# EAGLE board IndustrialUSBtoModbus_Production (EAGLE 9.7.0), part 1 of 2
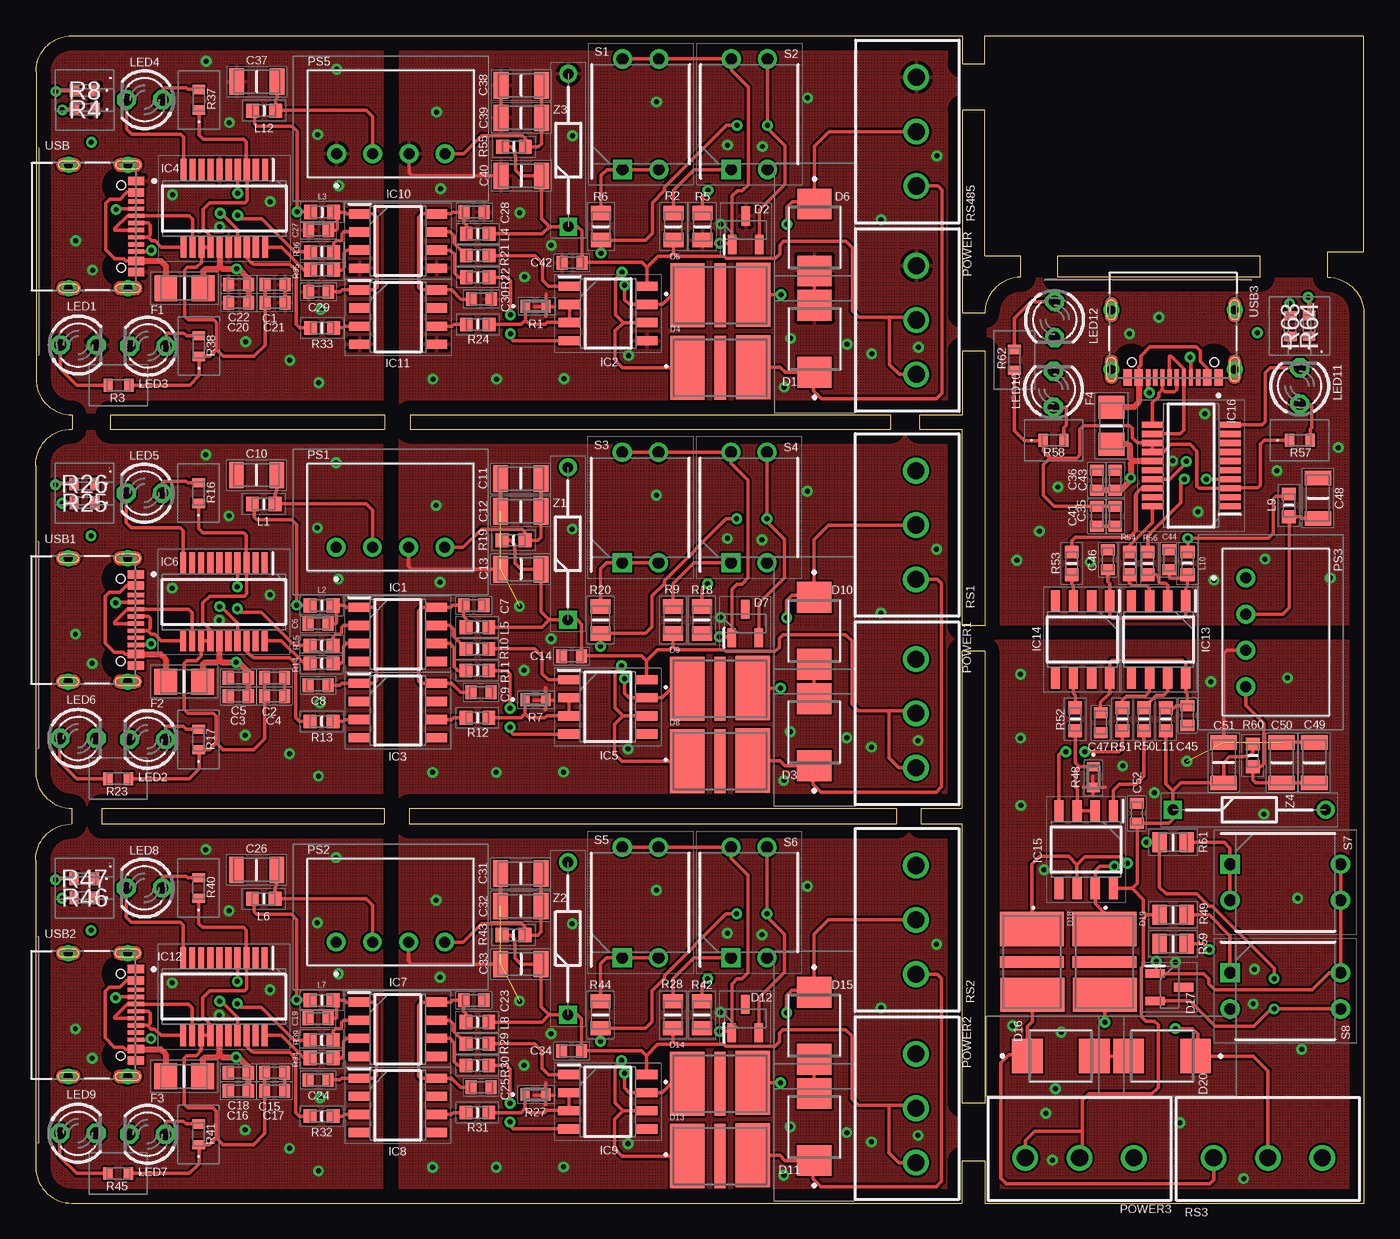
[diagram p0: board, top side]
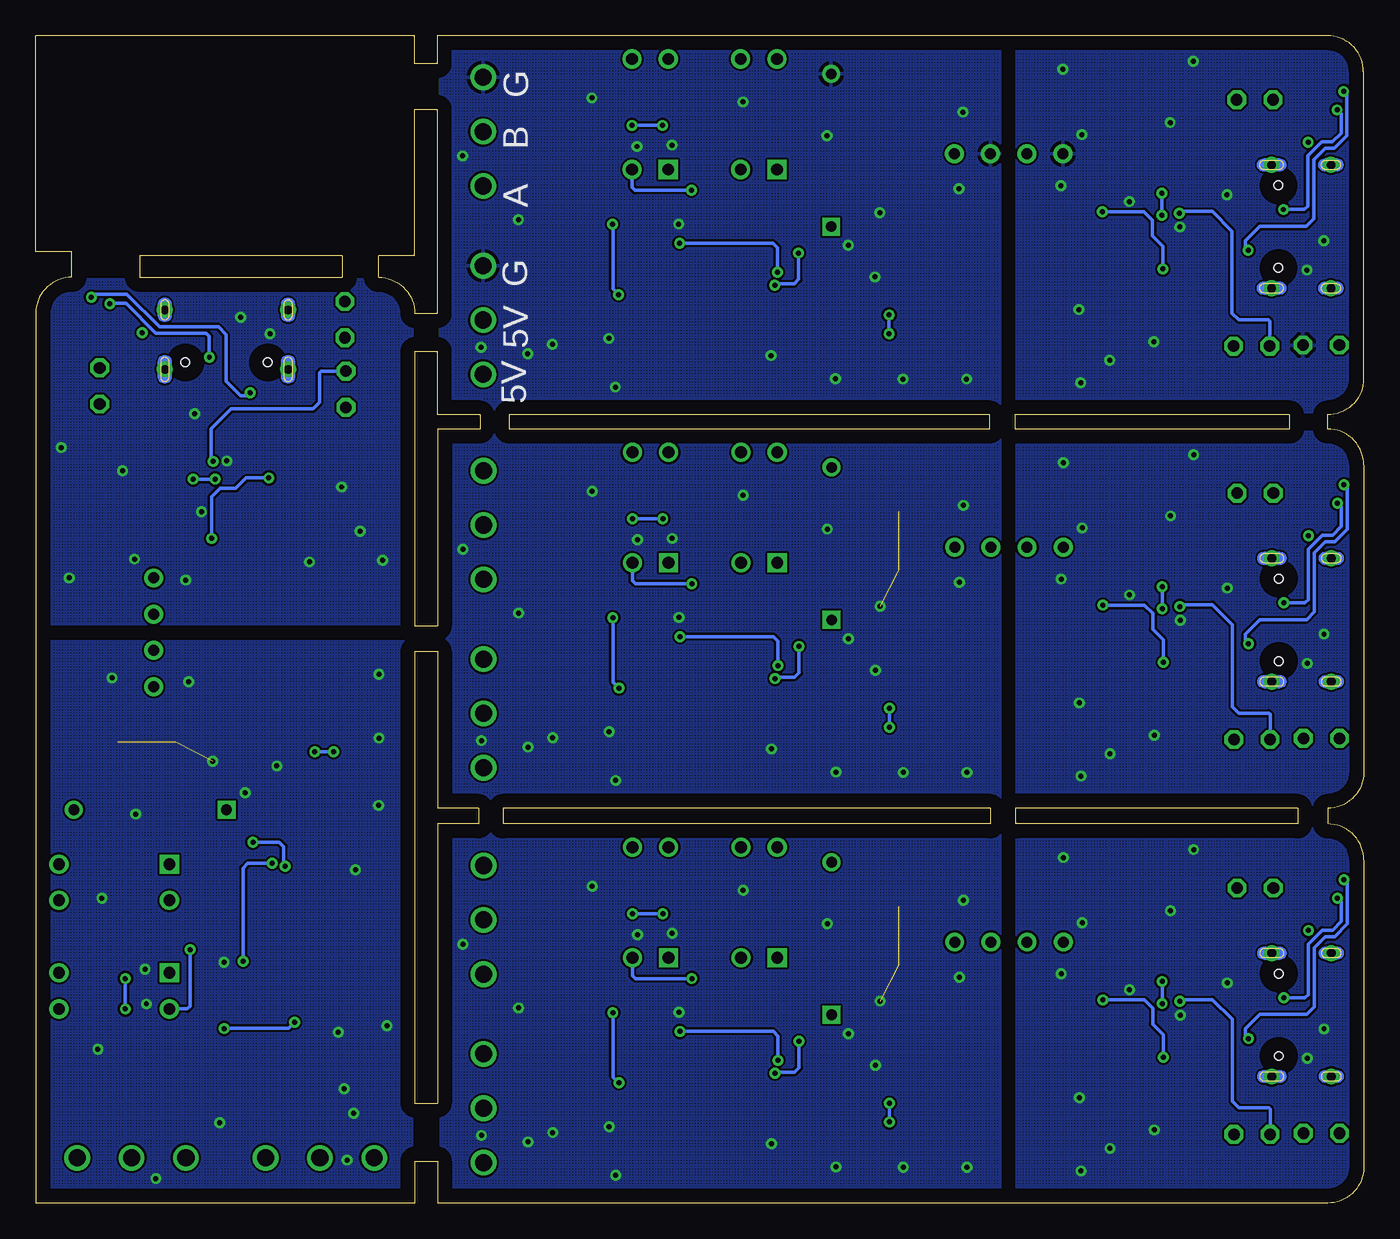
[diagram p1: board, bottom side, seen from below]

Size 93.17 x 81.86 mm. Coordinates in mm from the lower left corner, seen from the top.
Outline: 5.22,55.27 24.47,55.27 24.47,54.28 5.22,54.28 5.22,55.27
Outline: 26.27,55.27 59.97,55.27 59.97,54.28 26.27,54.28 26.27,55.27
Outline: 62,55.27 65,55.27 65,59.73 66.57,59.73 66.57,40.48 64.97,40.48 64.97,54.28 62,54.28 62,55.27
Outline: 0.03,79.32 0.03,57.81 arc90 2.57,55.27 2.57,54.28 2.54,54.28 arc90 0,51.74 0,30.23 arc90 2.54,27.69 2.54,26.59 arc90 0,24.05 0,2.54 arc90 2.54,0 64.97,0 64.97,2.95 66.57,2.95 66.57,0 93.17,0 93.17,62.38 arc90 90.63,64.92 90.63,66.7 93.17,66.7 93.17,81.86 66.57,81.86 66.57,79.91 65,79.91 65,81.86 2.57,81.86 arc90 0.03,79.32
Outline: 65,76.67 65,62.38 66.57,62.38 arc-90 69.11,64.92 69.11,66.45 66.57,66.45 66.57,76.67 65,76.67
Outline: 4.64,27.69 24.43,27.69 24.43,26.59 4.64,26.59 4.64,27.69
Outline: 26.21,27.69 60.39,27.69 60.39,26.59 26.21,26.59 26.21,27.69
Outline: 62.11,27.69 64.97,27.69 64.97,38.68 66.57,38.68 66.57,7.01 64.97,7.01 64.97,26.59 62.11,26.59 62.11,27.69
Outline: 85.88,64.92 71.65,64.92 71.65,66.45 85.88,66.45 85.88,64.92
Copper layers (1*16): Top 0.035mm / dielectric 1.5mm / Bottom 0.035mm
Design rules "Fusion Electronics Design Rules": minimum track width 10mil, minimum drill 0.35mm, track to track 6mil, track to pad 6mil, pad to pad 6mil, via to via 6mil, smd to smd 6mil, copper to edge 40mil, drill to drill 6mil, minimum pad ring 10mil, minimum via ring 8mil, stop-mask expansion 4mil, vias tented up to drill 0.36mm, thermal gap 10mil

## Footprints (pad centres in the part's own frame; a part is rotated, then mirrored left to right if it is on the bottom)
CAPC1608X87N = smd 0.78 x 0.98: 1 -0.7,0; 2 0.7,0
CAPC3216X170N = smd 1.03 x 1.87: 1 -1.42,0; 2 1.42,0
TISP4240M3BJRS = smd 2.16 x 2.4: 1 -2.35,0; 2 2.35,0
SOT95P237X111-3N = smd 1.35 x 0.6: 1 -1,0.95; 2 -1,-0.95; 3 1,0
DIOC650X400X100N = smd 2.4 x 4.5: 1 -2.3,0; 3 2.3,0.05 | smd 0.8 x 4.5: 2 0,0
FUSC3216X75N = smd 1.61 x 1.82: 1 -1.3,0; 2 1.3,0
SOIC127P600X175-8N = smd 1.5 x 0.65: 1 -2.7,1.905; 2 -2.7,0.635; 3 -2.7,-0.635; 4 -2.7,-1.905; 5 2.7,-1.905; 6 2.7,-0.635; 7 2.7,0.635; 8 2.7,1.905
SOIC127P600X175-8N' = smd 1.525 x 0.65: 1 -2.712,1.905; 2 -2.712,0.635; 3 -2.712,-0.635; 4 -2.712,-1.905; 5 2.712,-1.905; 6 2.712,-0.635; 7 2.712,0.635; 8 2.712,1.905
SOP64P599X175-20N = smd 1.526 x 0.435: 1 -2.712,2.858; 2 -2.712,2.222; 3 -2.712,1.588; 4 -2.712,0.952; 5 -2.712,0.318; 6 -2.712,-0.318; 7 -2.712,-0.952; 8 -2.712,-1.588; 9 -2.712,-2.222; 10 -2.712,-2.858; 11 2.712,-2.858; 12 2.712,-2.222; 13 2.712,-1.588; 14 2.712,-0.952; 15 2.712,-0.318; 16 2.712,0.318; 17 2.712,0.952; 18 2.712,1.588; 19 2.712,2.222; 20 2.712,2.858
INDC1608X95N = smd 0.9 x 1: 1 -0.8,0; 2 0.8,0
LED3MM = drill 0.813 octagon: A -1.27,0; K 1.27,0
1803439 = drill 1.2 pad 1.8: 1 -7.62,0; 2 -3.81,0; 3 0,0
IL0505S = drill 0.77 pad 1.32: 1 -3.81,-1.755; 2 -1.27,-1.755; 3 1.27,-1.755; 4 3.81,-1.755
ERJ3EK_(0603) = smd 0.65 x 0.9: 1 -0.725,0; 2 0.725,0
RESC2012X65N = smd 1 x 1.4: 1 -0.95,0; 2 0.95,0
ERJH3 = smd 0.65 x 0.9: 1 -0.725,0; 2 0.725,0
RESC1608X55N = smd 0.9 x 0.95: 1 -0.8,0; 2 0.8,0
DIP775W63P254L655H458Q4N = drill 0.83 pad 1.23 square: 1 -3.875,1.27 | drill 0.83 pad 1.23: 2 -3.875,-1.27; 3 3.875,-1.27; 4 3.875,1.27
HRO_TYPE-C-31-M-12 = smd 0.6 x 1.14: A1_B12 -3.2,4.75; A4_B9 -2.4,4.75; B1_A12 3.2,4.75; B4_A9 2.4,4.75 | smd 0.3 x 1.14: A5 -1.25,4.75; A6 -0.25,4.75; A7 0.25,4.75; A8 1.25,4.75; B5 1.75,4.75; B6 0.75,4.75; B7 -0.75,4.75; B8 -1.75,4.75 | drill 0.6 pad 0.9: S1 -4.325,4.17; S2 4.325,4.17; S3 -4.325,0; S4 4.325,0 | hole 0.6: -2.89,3.68; 2.89,3.68
DIOAD1068W53L380D172 = drill 0.75 pad 1.15 square: 1 0,0 | drill 0.75 pad 1.15: 2 10.7,0

## Placement (x,y rotation side)
C1  100nf  [CAPC1608X87N]  16.79,64.41 0 top
C2  100nf  [CAPC1608X87N]  16.76,36.83 0 top
C3  100nf  [CAPC1608X87N]  14.22,35.56 0 top
C4  100nf  [CAPC1608X87N]  16.76,35.56 0 top
C5  100nf  [CAPC1608X87N]  14.22,36.83 0 top
C6  100nf  [CAPC1608X87N]  19.81,40.64 180 top
C7  100nf  [CAPC1608X87N]  30.73,41.91 0 top
C8  100nf  [CAPC1608X87N]  19.81,36.32 180 top
C9  100nf  [CAPC1608X87N]  31.24,35.81 0 top
C10  10uf  [CAPC3216X170N]  15.49,51.05 180 top
C11  10uf  [CAPC3216X170N]  34.04,50.8 180 top
C12  10uf  [CAPC3216X170N]  34.04,48.51 180 top
C13  10uf  [CAPC3216X170N]  34.04,44.45 0 top
C14  100nf  [CAPC1608X87N]  37.59,38.35 0 top
C15  100nf  [CAPC1608X87N]  16.76,9.14 0 top
C16  100nf  [CAPC1608X87N]  14.22,7.87 0 top
C17  100nf  [CAPC1608X87N]  16.76,7.87 0 top
C18  100nf  [CAPC1608X87N]  14.22,9.14 0 top
C19  100nf  [CAPC1608X87N]  19.81,12.95 180 top
C20  100nf  [CAPC1608X87N]  14.25,63.14 0 top
C21  100nf  [CAPC1608X87N]  16.79,63.14 0 top
C22  100nf  [CAPC1608X87N]  14.25,64.41 0 top
C23  100nf  [CAPC1608X87N]  30.73,14.22 0 top
C24  100nf  [CAPC1608X87N]  19.81,8.64 180 top
C25  100nf  [CAPC1608X87N]  31.24,8.13 0 top
C26  10uf  [CAPC3216X170N]  15.49,23.37 180 top
C27  100nf  [CAPC1608X87N]  19.84,68.22 180 top
C28  100nf  [CAPC1608X87N]  30.76,69.49 0 top
C29  100nf  [CAPC1608X87N]  19.84,63.91 180 top
C30  100nf  [CAPC1608X87N]  31.27,63.4 0 top
C31  10uf  [CAPC3216X170N]  34.04,23.11 180 top
C32  10uf  [CAPC3216X170N]  34.04,20.83 180 top
C33  10uf  [CAPC3216X170N]  34.04,16.76 0 top
C34  100nf  [CAPC1608X87N]  37.59,10.67 0 top
C35  100nf  [CAPC1608X87N]  75.72,48.16 270 top
C36  100nf  [CAPC1608X87N]  74.45,50.7 270 top
C37  10uf  [CAPC3216X170N]  15.52,78.64 180 top
C38  10uf  [CAPC3216X170N]  34.06,78.38 180 top
C39  10uf  [CAPC3216X170N]  34.06,76.1 180 top
C40  10uf  [CAPC3216X170N]  34.06,72.03 0 top
C41  100nf  [CAPC1608X87N]  74.45,48.16 270 top
C42  100nf  [CAPC1608X87N]  37.62,65.94 0 top
C43  100nf  [CAPC1608X87N]  75.72,50.7 270 top
C44  100nf  [CAPC1608X87N]  79.53,45.11 90 top
C45  100nf  [CAPC1608X87N]  80.8,34.19 270 top
C46  100nf  [CAPC1608X87N]  75.21,45.11 90 top
C47  100nf  [CAPC1608X87N]  74.7,33.68 270 top
C48  10uf  [CAPC3216X170N]  89.94,49.43 90 top
C49  10uf  [CAPC3216X170N]  89.69,30.89 90 top
C50  10uf  [CAPC3216X170N]  87.4,30.89 90 top
C51  10uf  [CAPC3216X170N]  83.34,30.89 270 top
C52  100nf  [CAPC1608X87N]  77.24,27.33 270 top
D1  TISP4240M3BJR-S  [TISP4240M3BJRS]  54.64,60.6 90 top
D2  SM712-02HTG  [SOT95P237X111-3N]  49.81,68.22 90 top
D3  TISP4240M3BJR-S  [TISP4240M3BJRS]  54.61,33.02 90 top
D4  TBU-CA065-200-WH  [DIOC650X400X100N]  48.03,58.57 0 top
D5  TBU-CA065-200-WH  [DIOC650X400X100N]  48.03,63.65 0 top
D6  TISP4240M3BJR-S  [TISP4240M3BJRS]  54.64,67.72 270 top
D7  SM712-02HTG  [SOT95P237X111-3N]  49.78,40.64 90 top
D8  TBU-CA065-200-WH  [DIOC650X400X100N]  48.01,30.99 0 top
D9  TBU-CA065-200-WH  [DIOC650X400X100N]  48.01,36.07 0 top
D10  TISP4240M3BJR-S  [TISP4240M3BJRS]  54.61,40.13 270 top
D11  TISP4240M3BJR-S  [TISP4240M3BJRS]  54.61,5.33 90 top
D12  SM712-02HTG  [SOT95P237X111-3N]  49.78,12.95 90 top
D13  TBU-CA065-200-WH  [DIOC650X400X100N]  48.01,3.3 0 top
D14  TBU-CA065-200-WH  [DIOC650X400X100N]  48.01,8.38 0 top
D15  TISP4240M3BJR-S  [TISP4240M3BJRS]  54.61,12.45 270 top
D16  TISP4240M3BJR-S  [TISP4240M3BJRS]  71.91,10.31 0 top
D17  SM712-02HTG  [SOT95P237X111-3N]  79.53,15.14 0 top
D18  TBU-CA065-200-WH  [DIOC650X400X100N]  69.88,16.92 270 top
D19  TBU-CA065-200-WH  [DIOC650X400X100N]  74.96,16.92 270 top
D20  TISP4240M3BJR-S  [TISP4240M3BJRS]  79.02,10.31 180 top
F1  0ZCJ0010FF2E  [FUSC3216X75N]  10.44,64.16 180 top
F2  0ZCJ0010FF2E  [FUSC3216X75N]  10.41,36.58 180 top
F3  0ZCJ0010FF2E  [FUSC3216X75N]  10.41,8.89 180 top
F4  0ZCJ0010FF2E  [FUSC3216X75N]  75.46,54.51 90 top
IC1  ADUM1201ARZ  [SOIC127P600X175-8N]  25.4,39.88 0 top
IC2  MAX485CSA+  [SOIC127P600X175-8N']  40.16,62.38 0 top
IC3  ADUM1201ARZ  [SOIC127P600X175-8N]  25.4,34.54 0 top
IC4  FT231XS-R  [SOP64P599X175-20N]  13.23,69.75 270 top
IC5  MAX485CSA+  [SOIC127P600X175-8N']  40.13,34.8 0 top
IC6  FT231XS-R  [SOP64P599X175-20N]  13.21,42.16 270 top
IC7  ADUM1201ARZ  [SOIC127P600X175-8N]  25.4,12.19 0 top
IC8  ADUM1201ARZ  [SOIC127P600X175-8N]  25.4,6.86 0 top
IC9  MAX485CSA+  [SOIC127P600X175-8N']  40.13,7.11 0 top
IC10  ADUM1201ARZ  [SOIC127P600X175-8N]  25.43,67.46 0 top
IC11  ADUM1201ARZ  [SOIC127P600X175-8N]  25.43,62.13 0 top
IC12  FT231XS-R  [SOP64P599X175-20N]  13.21,14.48 270 top
IC13  ADUM1201ARZ  [SOIC127P600X175-8N]  78.77,39.52 270 top
IC14  ADUM1201ARZ  [SOIC127P600X175-8N]  73.43,39.52 270 top
IC15  MAX485CSA+  [SOIC127P600X175-8N']  73.69,24.79 270 top
IC16  FT231XS-R  [SOP64P599X175-20N]  81.05,51.71 180 top
L1  300ohms  [INDC1608X95N]  16,49.02 0 top
L2  300ohms  [INDC1608X95N]  20.07,41.91 0 top
L3  300ohms  [INDC1608X95N]  20.09,69.49 0 top
L4  300ohms  [INDC1608X95N]  31.01,67.97 0 top
L5  300ohms  [INDC1608X95N]  30.99,40.39 0 top
L6  300ohms  [INDC1608X95N]  16,21.34 0 top
L7  300ohms  [INDC1608X95N]  20.07,14.22 0 top
L8  300ohms  [INDC1608X95N]  30.99,12.7 0 top
L9  300ohms  [INDC1608X95N]  87.91,48.92 270 top
L10  300ohms  [INDC1608X95N]  80.8,44.86 270 top
L11  300ohms  [INDC1608X95N]  79.27,33.93 270 top
L12  300ohms  [INDC1608X95N]  16.03,76.61 0 top
LED1  [LED3MM]  3,60.17 0 top
LED2  [LED3MM]  7.85,32.51 180 top
LED3  [LED3MM]  7.87,60.1 180 top
LED4  [LED3MM]  7.65,77.37 180 top
LED5  [LED3MM]  7.62,49.78 180 top
LED6  [LED3MM]  2.97,32.59 0 top
LED7  [LED3MM]  7.85,4.83 180 top
LED8  [LED3MM]  7.62,22.1 180 top
LED9  [LED3MM]  2.97,4.9 0 top
LED10  [LED3MM]  71.4,57.07 90 top
LED11  [LED3MM]  88.67,57.3 90 top
LED12  [LED3MM]  71.48,61.95 270 top
POWER  1803439  [1803439]  61.77,58.12 270 top
POWER1  1803439  [1803439]  61.75,30.53 270 top
POWER2  1803439  [1803439]  61.75,2.84 270 top
POWER3  1803439  [1803439]  69.42,3.18 180 top
PS1  IL0505S  [IL0505S]  24.89,47.75 0 top
PS2  IL0505S  [IL0505S]  24.89,20.07 0 top
PS3  IL0505S  [IL0505S]  86.64,40.03 270 top
PS5  IL0505S  [IL0505S]  24.92,75.34 0 top
R1  10k  [ERJ3EK_(0603)]  35.08,62.89 0 top
R2  4k7  [RESC2012X65N]  44.73,68.48 90 top
R3  330  [ERJH3]  5.82,57.35 180 top
R4  5.1k  [ERJH3]  3.45,76.69 180 top
R5  4k7  [RESC2012X65N]  46.76,68.48 90 top
R6  120  [RESC2012X65N]  39.65,68.48 90 top
R7  10k  [ERJ3EK_(0603)]  35.05,35.31 0 top
R8  5.1k  [ERJH3]  3.44,78.02 180 top
R9  4k7  [RESC2012X65N]  44.7,40.89 90 top
R10  47r  [RESC1608X55N]  30.99,38.86 0 top
R11  47r  [RESC1608X55N]  30.99,37.34 0 top
R12  47r  [RESC1608X55N]  30.99,34.04 0 top
R13  47r  [RESC1608X55N]  20.07,33.78 180 top
R14  47r  [RESC1608X55N]  20.07,37.85 180 top
R15  47r  [RESC1608X55N]  20.07,39.12 180 top
R16  330  [ERJH3]  11.43,49.78 90 top
R17  330  [ERJH3]  11.43,32.51 90 top
R18  4k7  [RESC2012X65N]  46.74,40.89 90 top
R19  300ohms  [INDC1608X95N]  33.53,46.48 180 top
R20  120  [RESC2012X65N]  39.62,40.89 90 top
R21  47r  [RESC1608X55N]  31.01,66.45 0 top
R22  47r  [RESC1608X55N]  31.01,64.92 0 top
R23  330  [ERJH3]  5.79,29.77 180 top
R24  47r  [RESC1608X55N]  31.01,61.62 0 top
R25  5.1k  [ERJH3]  3.43,49.11 180 top
R26  5.1k  [ERJH3]  3.42,50.43 180 top
R27  10k  [ERJ3EK_(0603)]  35.05,7.62 0 top
R28  4k7  [RESC2012X65N]  44.7,13.21 90 top
R29  47r  [RESC1608X55N]  30.99,11.18 0 top
R30  47r  [RESC1608X55N]  30.99,9.65 0 top
R31  47r  [RESC1608X55N]  30.99,6.35 0 top
R32  47r  [RESC1608X55N]  20.07,6.1 180 top
R33  47r  [RESC1608X55N]  20.09,61.37 180 top
R34  47r  [RESC1608X55N]  20.07,10.16 180 top
R35  47r  [RESC1608X55N]  20.09,65.43 180 top
R36  47r  [RESC1608X55N]  20.09,66.7 180 top
R37  330  [ERJH3]  11.46,77.37 90 top
R38  330  [ERJH3]  11.46,60.1 90 top
R39  47r  [RESC1608X55N]  20.07,11.43 180 top
R40  330  [ERJH3]  11.43,22.1 90 top
R41  330  [ERJH3]  11.43,4.83 90 top
R42  4k7  [RESC2012X65N]  46.74,13.21 90 top
R43  300ohms  [INDC1608X95N]  33.53,18.8 180 top
R44  120  [RESC2012X65N]  39.62,13.21 90 top
R45  330  [ERJH3]  5.79,2.08 180 top
R46  5.1k  [ERJH3]  3.43,21.42 180 top
R47  5.1k  [ERJH3]  3.42,22.74 180 top
R48  10k  [ERJ3EK_(0603)]  74.19,29.87 270 top
R49  4k7  [RESC2012X65N]  79.78,20.22 0 top
R50  47r  [RESC1608X55N]  77.75,33.93 270 top
R51  47r  [RESC1608X55N]  76.23,33.93 270 top
R52  47r  [RESC1608X55N]  72.92,33.93 270 top
R53  47r  [RESC1608X55N]  72.67,44.86 90 top
R54  47r  [RESC1608X55N]  76.73,44.86 90 top
R55  300ohms  [INDC1608X95N]  33.55,74.07 180 top
R56  47r  [RESC1608X55N]  78,44.86 90 top
R57  330  [ERJH3]  88.67,53.49 0 top
R58  330  [ERJH3]  71.4,53.49 0 top
R59  4k7  [RESC2012X65N]  79.78,18.19 0 top
R60  300ohms  [INDC1608X95N]  85.37,31.39 90 top
R61  120  [RESC2012X65N]  79.78,25.3 0 top
R62  330  [ERJH3]  68.66,59.13 90 top
R63  5.1k  [ERJH3]  88,61.49 90 top
R64  5.1k  [ERJH3]  89.32,61.51 90 top
RS1  1803439  [1803439]  61.75,43.74 270 top
RS2  1803439  [1803439]  61.75,16.05 270 top
RS3  1803439  [1803439]  82.63,3.18 180 top
RS485  1803439  [1803439]  61.77,71.32 270 top
S1  210-2MS  [DIP775W63P254L655H458Q4N]  42.44,76.35 90 top
S2  210-2MS  [DIP775W63P254L655H458Q4N]  50.06,76.35 90 top
S3  210-2MS  [DIP775W63P254L655H458Q4N]  42.42,48.77 90 top
S4  210-2MS  [DIP775W63P254L655H458Q4N]  50.04,48.77 90 top
S5  210-2MS  [DIP775W63P254L655H458Q4N]  42.42,21.08 90 top
S6  210-2MS  [DIP775W63P254L655H458Q4N]  50.04,21.08 90 top
S7  210-2MS  [DIP775W63P254L655H458Q4N]  87.66,22.5 0 top
S8  210-2MS  [DIP775W63P254L655H458Q4N]  87.66,14.88 0 top
USB  TYPE-C-31-M-12  [HRO_TYPE-C-31-M-12]  2.31,68.48 270 top
USB1  TYPE-C-31-M-12  [HRO_TYPE-C-31-M-12]  2.29,40.89 270 top
USB2  TYPE-C-31-M-12  [HRO_TYPE-C-31-M-12]  2.29,13.21 270 top
USB3  TYPE-C-31-M-12  [HRO_TYPE-C-31-M-12]  79.78,62.64 180 top
Z1  1N5231CTR  [DIOAD1068W53L380D172]  37.34,40.89 90 top
Z2  1N5231CTR  [DIOAD1068W53L380D172]  37.34,13.21 90 top
Z3  1N5231CTR  [DIOAD1068W53L380D172]  37.36,68.48 90 top
Z4  1N5231CTR  [DIOAD1068W53L380D172]  79.78,27.58 0 top

## Library data of the parts
C1-C5 C14-C18 C20-C22 C34-C36 C41-C43 C52 = AKCP; DESCRIPTION: Wurth Elektronik 0603 WCAP-CSGP 100nF Ceramic Multilayer Capacitor, 25 V dc, +125C, X7R Dielectric, +/-10%; DIGIKEY_PARTNUMBER: 732-7989-1-ND; DIGIKEY_PRICE-STOCK: https://www.digikey.com/product-detail/en/w%C3%BCrth-elektronik/885012206071/732-7989-1-ND/5454616; HEIGHT: 0.87mm; MANUFACTURER_NAME: Wurth Elektronik; MANUFACTURER_PART_NUMBER: 885012206071; MOUSER_PART_NUMBER: 710-885012206071; MOUSER_PRICE-STOCK: https://www.mouser.co.uk/ProductDetail/Wurth-Elektronik/885012206071?qs=0KOYDY2FL2%2FEBQkuHgvarg%3D%3D
C6-C9 C19 C23-C25 C27-C30 C44-C47 = Raritan Base; DESCRIPTION: Wurth Elektronik 0603 WCAP-CSGP 100nF Ceramic Multilayer Capacitor, 25 V dc, +125C, X7R Dielectric, +/-10%; DIGIKEY_PARTNUMBER: 732-7989-1-ND; DIGIKEY_PRICE-STOCK: https://www.digikey.com/product-detail/en/w%C3%BCrth-elektronik/885012206071/732-7989-1-ND/5454616; HEIGHT: 0.87mm; MANUFACTURER_NAME: Wurth Elektronik; MANUFACTURER_PART_NUMBER: 885012206071; MOUSER_PART_NUMBER: 710-885012206071; MOUSER_PRICE-STOCK: https://www.mouser.co.uk/ProductDetail/Wurth-Elektronik/885012206071?qs=0KOYDY2FL2%2FEBQkuHgvarg%3D%3D
C10-C13 C26 C31-C33 C37-C40 C48-C51 = SamacSys_Parts; DESCRIPTION: Multilayer Ceramic Capacitors MLCC - SMD/SMT 10uF 25volts 10%; HEIGHT: 1.7mm; MANUFACTURER_NAME: Vishay; MANUFACTURER_PART_NUMBER: VJ1206G106KXXTW1BC; MOUSER_PART_NUMBER: 77-VJ126G106KXXTW1BC; MOUSER_PRICE-STOCK: https://www.mouser.co.uk/ProductDetail/Vishay-Vitramon/VJ1206G106KXXTW1BC?qs=%252BqhDFMvZazSFJ5Hhl5VYQw%3D%3D
D1 D3 D6 D10 D11 D15 D16 D20 = TISP4240M3BJR-S; DESCRIPTION: BOURNS - TISP4240M3BJR-S - THYRISTOR, O.VOLT. PROT., 180V, SMB; HEIGHT: 2.4mm; MANUFACTURER_NAME: Bourns; MANUFACTURER_PART_NUMBER: TISP4240M3BJR-S; MOUSER_PART_NUMBER: 652-TISP4240M3BJR-S; MOUSER_PRICE-STOCK: https://www.mouser.co.uk/ProductDetail/Bourns/TISP4240M3BJR-S?qs=0zoXPJiSMmNlDn5QEdP1vg%3D%3D
D2 D7 D12 D17 = SamacSys_Parts; DESCRIPTION: ESD Suppressors / TVS Diodes 600W 2 Channel Green Asymmetrical SOT23-3; DIGIKEY_PARTNUMBER: F6450CT-ND; DIGIKEY_PRICE-STOCK: https://www.digikey.com/product-detail/en/littelfuse-inc/SM712-02HTG/F6450CT-ND/5019610; HEIGHT: 1.11mm; MANUFACTURER_NAME: LITTELFUSE; MANUFACTURER_PART_NUMBER: SM712-02HTG; MOUSER_PART_NUMBER: 576-SM712-02HTG; MOUSER_PRICE-STOCK: https://www.mouser.co.uk/ProductDetail/Littelfuse/SM712-02HTG?qs=aGgfWYEhH7lQgBVBPCUDkw%3D%3D
D4 D5 D8 D9 D13 D14 D18 D19 = TBU-CA065-200-WH; AVAILABILITY: In Stock; CHECK_PRICES: https://www.snapeda.com/parts/TBU-CA065-200-WH/Bourns+-+J.W.+Miller/view-part/?ref=eda; DESCRIPTION: A Single Bi-Directional, 650V, 200mA, 3-Pin DFN pkg TBU | Bourns TBU-CA065-200-WH; MF: Bourns; MP: TBU-CA065-200-WH; PACKAGE: SMD-4 Bourns; PRICE: None; PURCHASE-URL: https://www.snapeda.com/api/url_track_click_mouser/?unipart_id=587286&manufacturer=Bourns&part_name=TBU-CA065-200-WH&search_term=None; SNAPEDA_LINK: https://www.snapeda.com/parts/TBU-CA065-200-WH/Bourns+-+J.W.+Miller/view-part/?ref=snap
F1-F4 = AccesControlNFC; DESCRIPTION: Resettable Fuses - PPTC Fuse; HEIGHT: 0.75mm; MANUFACTURER_NAME: Stewart Connector; MANUFACTURER_PART_NUMBER: 0ZCJ0010FF2E; MOUSER_PART_NUMBER: 530-0ZCJ0010FF2E; MOUSER_PRICE-STOCK: https://www.mouser.co.uk/ProductDetail/Bel-Fuse/0ZCJ0010FF2E?qs=SRYZG9HaIQ2ZPdy0ahZ08g%3D%3D
IC1 IC3 IC7 IC8 IC10 IC11 IC13 IC14 = Raritan Base; DESCRIPTION: Dual-Channel Digital Isolators; HEIGHT: 1.75mm; MANUFACTURER_NAME: Analog Devices; MANUFACTURER_PART_NUMBER: ADUM1201ARZ; MOUSER_PART_NUMBER: 584-ADUM1201ARZ; MOUSER_PRICE-STOCK: https://www.mouser.co.uk/ProductDetail/Analog-Devices/ADUM1201ARZ?qs=WIvQP4zGanhnZkk5OvV4Vw%3D%3D
IC2 IC5 IC9 IC15 = AKCP; DESCRIPTION: MAX485CSA+, Line Transceiver, RS-485, RS-422 2.5Mbit/s Differential, 5V, 8-Pin SOIC; HEIGHT: 1.75mm; MANUFACTURER_NAME: Maxim Integrated; MANUFACTURER_PART_NUMBER: MAX485CSA+; MOUSER_PART_NUMBER: 700-MAX485CSA; MOUSER_PRICE-STOCK: https://www.mouser.co.uk/ProductDetail/Maxim-Integrated/MAX485CSA%2b?qs=1THa7WoU59EQmpurcwoy4Q%3D%3D
IC4 IC6 IC12 IC16 = AKCP; DESCRIPTION: FTDI Chip FT231XS-R, Interface RS232, RS422, RS485, SIE, UART 3MBd, 5 V, 20-pin, SSOP; HEIGHT: 1.753mm; MANUFACTURER_NAME: FTDI Chip; MANUFACTURER_PART_NUMBER: FT231XS-R; MOUSER_PART_NUMBER: 895-FT231XS-R; MOUSER_PRICE-STOCK: https://www.mouser.co.uk/ProductDetail/FTDI/FT231XS-R?qs=Gp1Yz1mis3WduRPsgrTbtg%3D%3D
L1-L12 R19 R43 R55 R60 = Raritan Base; ARROW_PART_NUMBER: MMZ1608B301CTAH0; DESCRIPTION: Ferrite Beads Multi-Layer 300Ohm 25% 100MHz 500mA 250mOhm DCR 0603 T/R; HEIGHT: 0.95mm; MANUFACTURER_NAME: TDK; MANUFACTURER_PART_NUMBER: MMZ1608B301CTAH0
LED1-LED12 = led
POWER POWER1-POWER3 RS1-RS3 RS485 = 1803439; DESCRIPTION: 3 way vertical PCB header,3.81mm pitch Phoenix Contact MCV Series, 3.81mm Pitch 3 Way 1 Row Straight PCB Header, Solder Termination, 8A; HEIGHT: mm; MANUFACTURER_NAME: Phoenix Contact; MANUFACTURER_PART_NUMBER: 1803439; MOUSER_PART_NUMBER: 651-1803439; MOUSER_PRICE-STOCK: https://www.mouser.co.uk/ProductDetail/Phoenix-Contact/1803439?qs=ChwaSN6Xm4%2FKqu7eZUAe4w%3D%3D
PS1-PS3 PS5 = IL0505S; DESCRIPTION: DC/DC Converter Isolated 5V 2W XP Power Through Hole 2W Isolated DC-DC Converter, Vin 4.5 5.5 V dc, I/O isolation 1000V dc, Vout 5V dc; HEIGHT: mm; MANUFACTURER_NAME: XP POWER; MANUFACTURER_PART_NUMBER: IL0505S; MOUSER_PART_NUMBER: 209-IL0505S; MOUSER_PRICE-STOCK: https://www.mouser.co.uk/ProductDetail/XP-Power/IL0505S?qs=w%2Fv1CP2dgqqMDzpB%252BgTJVA%3D%3D
R1 R7 R27 R48 = AKCP; DESCRIPTION: Thick Film Resistors - SMD 0603 10Kohms 1% AEC-Q200; HEIGHT: 0.55mm; MANUFACTURER_NAME: Panasonic; MANUFACTURER_PART_NUMBER: ERJ-3EKF1002V; MOUSER_PART_NUMBER: 667-ERJ-3EKF1002V; MOUSER_PRICE-STOCK: https://www.mouser.co.uk/ProductDetail/Panasonic/ERJ-3EKF1002V?qs=H7k1u0Mp9JSrGPQ5%2F5COuw%3D%3D
R2 R5 R6 R9 R18 R20 R28 R42 R44 R49 R59 R61 = SamacSys_Parts; ARROW_PART_NUMBER: ESR10EZPJ121; DESCRIPTION: Thick Film Resistors - SMD 0805 120ohm 5% Anti Surge AEC-Q200; DIGIKEY_PARTNUMBER: RHM120KCT-ND; DIGIKEY_PRICE-STOCK: https://www.digikey.com/product-detail/en/rohm-semiconductor/ESR10EZPJ121/RHM120KCT-ND/1762959; HEIGHT: 0.65mm; MANUFACTURER_NAME: ROHM Semiconductor; MANUFACTURER_PART_NUMBER: ESR10EZPJ121; MOUSER_PART_NUMBER: 755-ESR10EZPJ121; MOUSER_PRICE-STOCK: https://www.mouser.co.id/ProductDetail/ROHM-Semiconductor/ESR10EZPJ121?qs=%2Fha2pyFadui7JatYYUNpFhsZLPns7z%252BGDgMyY6tORV%2FueGFgrTXlFg%3D%3D; SPICEPREFIX: R
R3 R4 R8 R16 R17 R23 R25 R26 R37 R38 R40 R41 R45-R47 R57 R58 R62-R64 = AKCP; DESCRIPTION: Power Rating 0.125W,Resistance 330 Ohm,LxW(EIA) 1.6 x 0.8 (EIA:0603) mm; HEIGHT: mm; MANUFACTURER_NAME: Panasonic; MANUFACTURER_PART_NUMBER: ERJ-H3EF3300V; MOUSER_PART_NUMBER: 667-ERJ-H3EF3300V; MOUSER_PRICE-STOCK: https://www.mouser.co.uk/ProductDetail/Panasonic/ERJ-H3EF3300V?qs=eP2BKZSCXI61roRLPi8W7w%3D%3D
R10-R15 R21 R22 R24 R29-R36 R39 R50-R54 R56 = Raritan Base; DESCRIPTION: ERJ-PA3J470V; DIGIKEY_PARTNUMBER: P47.00BZCT-ND; DIGIKEY_PRICE-STOCK: https://www.digikey.com/product-detail/en/panasonic-electronic-components/ERJ-PA3J470V/P47-00BZCT-ND/5036330; HEIGHT: 0.55mm; MANUFACTURER_NAME: Panasonic; MANUFACTURER_PART_NUMBER: ERJ-PA3J470V; MOUSER_PART_NUMBER: 667-ERJ-PA3J470V; MOUSER_PRICE-STOCK: https://www.mouser.co.id/ProductDetail/Panasonic/ERJ-PA3J470V?qs=%2Fha2pyFadujfhmhVngkC6%252BrB%252BD0htnOagRQnEO%2FGREZyJH21elijFg%3D%3D
S1-S8 = SamacSys_Parts; DESCRIPTION: DIP Switches / SIP Switches 2 switch sections SPST; HEIGHT: 4.58mm; MANUFACTURER_NAME: CTS; MANUFACTURER_PART_NUMBER: 210-2MS; MOUSER_PART_NUMBER: 774-2102MS; MOUSER_PRICE-STOCK: https://www.mouser.com/Search/Refine.aspx?Keyword=774-2102MS; SPICEPREFIX: S
USB USB1-USB3 = TYPE-C-31-M-12; AVAILABILITY: Not in stock; CHECK_PRICES: https://www.snapeda.com/parts/TYPE-C-31-M-12/HRO+Electronics+Co.%252C+Ltd./view-part/?ref=eda; DESCRIPTION: USB Connectors 24 Receptacle 1 8.94*7.3mm RoHS; MF: HRO Electronics Co., Ltd.; MP: TYPE-C-31-M-12; PACKAGE: Package; PRICE: None; SNAPEDA_LINK: https://www.snapeda.com/parts/TYPE-C-31-M-12/HRO+Electronics+Co.%252C+Ltd./view-part/?ref=snap
Z1-Z4 = SamacSys_Parts; DESCRIPTION: Zener Diodes; DIGIKEY_PARTNUMBER: 1N5231CTRCT-ND; DIGIKEY_PRICE-STOCK: https://www.digikey.com/product-detail/en/on-semiconductor/1N5231CTR/1N5231CTRCT-ND/3907881; HEIGHT: mm; MANUFACTURER_NAME: ON Semiconductor; MANUFACTURER_PART_NUMBER: 1N5231CTR; MOUSER_PART_NUMBER: 512-1N5231CTR; MOUSER_PRICE-STOCK: https://www.mouser.com/Search/Refine.aspx?Keyword=512-1N5231CTR

## Nets
+3V3: C1.1 C21.1 IC4.3 IC4.13 IC4.14 R3.1 R37.1 R38.1
+5V: C20.2 C22.2 F1.1 IC4.15 L3.1 L12.1
A: D2.1 D4.1 IC2.6 S1.3 S1.4 S2.4
B: D2.2 D5.1 IC2.7 R6.1 S2.3
CBUS1: IC4.17 LED3.K
CBUS2: IC4.10 LED4.K
CC1: R4.2 USB.A5
CC2: R8.2 USB.B5
D+: IC4.11 USB.A6 USB.B6
D-: IC4.12 USB.A7 USB.B7
GND: C1.2 C20.1 C21.2 C22.1 C27.2 C29.2 C37.2 IC4.6 IC4.16 IC10.4 IC11.4 LED1.K PS5.1 R4.1 R8.1 USB.A1_B12 USB.B1_A12
GNDA: C28.2 C30.2 C38.2 C39.2 C40.1 C42.1 D1.2 D2.3 D6.2 IC2.5 IC10.5 IC11.5 POWER.1 PS5.3 R1.2 R5.1 RS485.1 Z3.2
N$1: C28.1 C30.1 IC10.8 IC11.8 L4.1
N$2: IC10.6 R22.1
N$3: LED3.A R38.2
N$4: IC10.7 R21.1
N$5: R2.2 S2.1
N$6: R5.2 S2.2
N$7: D5.3 D6.1 RS485.2
N$9: LED1.A R3.2
N$10: D1.1 D4.3 RS485.3
N$15: R6.2 S1.1 S1.2
N$38: LED4.A R37.2
N$43: C27.1 C29.1 IC10.1 IC11.1 L3.2
N$47: IC10.3 R35.1
N$48: IC10.2 R36.1
N$54: IC11.6 R24.1
N$64: IC11.3 R33.1
N$85: C37.1 L12.2 PS5.2
N$86: C38.1 C39.1 PS5.4 R55.1
RX: IC4.4 R36.2
RXD: IC2.1 R21.2
TX: IC4.20 R35.2
TXD: IC2.4 R22.2
TXEN: IC2.2 IC2.3 R1.1 R24.2
TXEN_: IC4.18 R33.2
VBUS: F1.2 USB.A4_B9 USB.B4_A9
VCC: C40.2 C42.2 IC2.8 L4.2 POWER.2 POWER.3 R2.1 R55.2 Z3.1